# EAGLE board CursorKeypad (EAGLE 7.4.1)

Size 160 x 100 mm. Coordinates in mm from the lower left corner, seen from the top.
Outline: 0,0 160,0 160,100 0,100 0,0
Outline: circle at 23.5,25 radius 20
Copper layers (1*16): Top 0.035mm / dielectric 1.5mm / Bottom 0.035mm
Design rules "default": minimum track width 10mil, minimum drill 24mil, track to track 8mil, track to pad 8mil, pad to pad 8mil, via to via 8mil, smd to smd 8mil, copper to edge 40mil, drill to drill 8mil, minimum pad ring 10mil, minimum via ring 8mil, stop-mask expansion 4mil, vias tented up to drill 0mil, thermal gap 10mil
Net classes: 0 default: width 0.3 mm; 1 Supply: width 0.762 mm
Holes 3.2 mm at 34,36 34,14 12,36 12,14

## Footprints (pad centres in the part's own frame; a part is rotated, then mirrored left to right if it is on the bottom)
3FT = drill 0.9 square: P$1 5.08,3.81; P$2 -5.08,3.81; P$3 5.08,-3.81; P$4 -5.08,-3.81
MA05-2 = drill 1.016 octagon: 1 -5.08,-1.27; 2 -5.08,1.27; 3 -2.54,-1.27; 4 -2.54,1.27; 5 0,-1.27; 6 0,1.27; 7 2.54,-1.27; 8 2.54,1.27; 9 5.08,-1.27; 10 5.08,1.27

## Placement (x,y rotation side)
KEY_CENTER  3FT1D  [3FT]  23.5,25 180 bottom
KEY_DOWN  3FT1D  [3FT]  23.5,12.5 180 bottom
KEY_LEFT  3FT1D  [3FT]  11,25 270 top
KEY_RIGHT  3FT1D  [3FT]  36,25 270 bottom
KEY_UP  3FT1D  [3FT]  23.5,37.5 180 top
SV1  Debounce L  [MA05-2]  7.62,-5.08 0 top  (outside the outline)
SV2  Debounce R  [MA05-2]  7.62,-15.24 0 top  (outside the outline)

## Library data of the parts
KEY_CENTER KEY_DOWN KEY_LEFT KEY_RIGHT KEY_UP = mec switches
SV1 SV2 = con-lstb; OC_FARNELL: unknown; OC_NEWARK: unknown

## Nets
GND [Supply]: KEY_CENTER.P$3 KEY_CENTER.P$4 KEY_DOWN.P$3 KEY_DOWN.P$4 KEY_LEFT.P$3 KEY_LEFT.P$4 KEY_RIGHT.P$3 KEY_RIGHT.P$4 KEY_UP.P$3 KEY_UP.P$4 SV2.1 SV2.2
KEY_CENTER: KEY_CENTER.P$1 KEY_CENTER.P$2 SV1.9 SV1.10
KEY_DOWN: KEY_DOWN.P$1 KEY_DOWN.P$2 SV1.7 SV1.8
KEY_LEFT: KEY_LEFT.P$1 KEY_LEFT.P$2 SV1.3 SV1.4
KEY_RIGHT: KEY_RIGHT.P$1 KEY_RIGHT.P$2 SV1.1 SV1.2
KEY_UP: KEY_UP.P$1 KEY_UP.P$2 SV1.5 SV1.6
N$6: SV2.9 SV2.10
N$7: SV2.7 SV2.8
N$8: SV2.5 SV2.6
N$9: SV2.3 SV2.4

## Tracks (layer width: path | path; a pad name or v marks a point on that pad's centre or on a via)
GND  (11 unrouted)
KEY_CENTER  (3 unrouted)
KEY_DOWN  (3 unrouted)
KEY_LEFT  (3 unrouted)
KEY_RIGHT  (3 unrouted)
KEY_UP  (3 unrouted)
N$6  (1 unrouted)
N$7  (1 unrouted)
N$8  (1 unrouted)
N$9  (1 unrouted)